# EAGLE board controll_8motor_dac_already_compl (EAGLE 9.3.2)
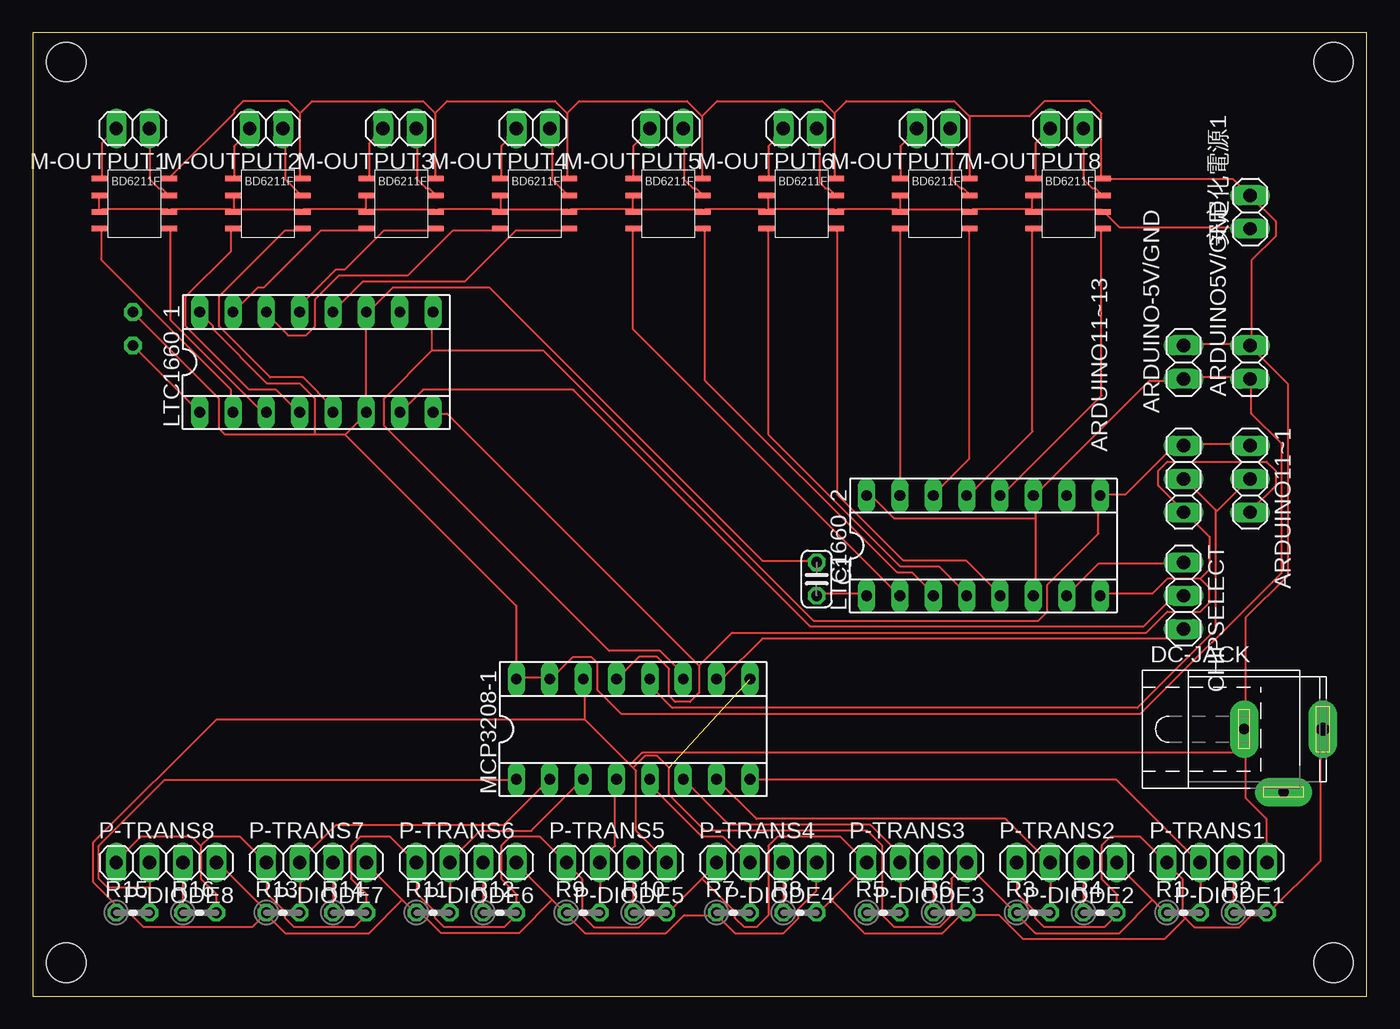
[diagram p0: board, top side]
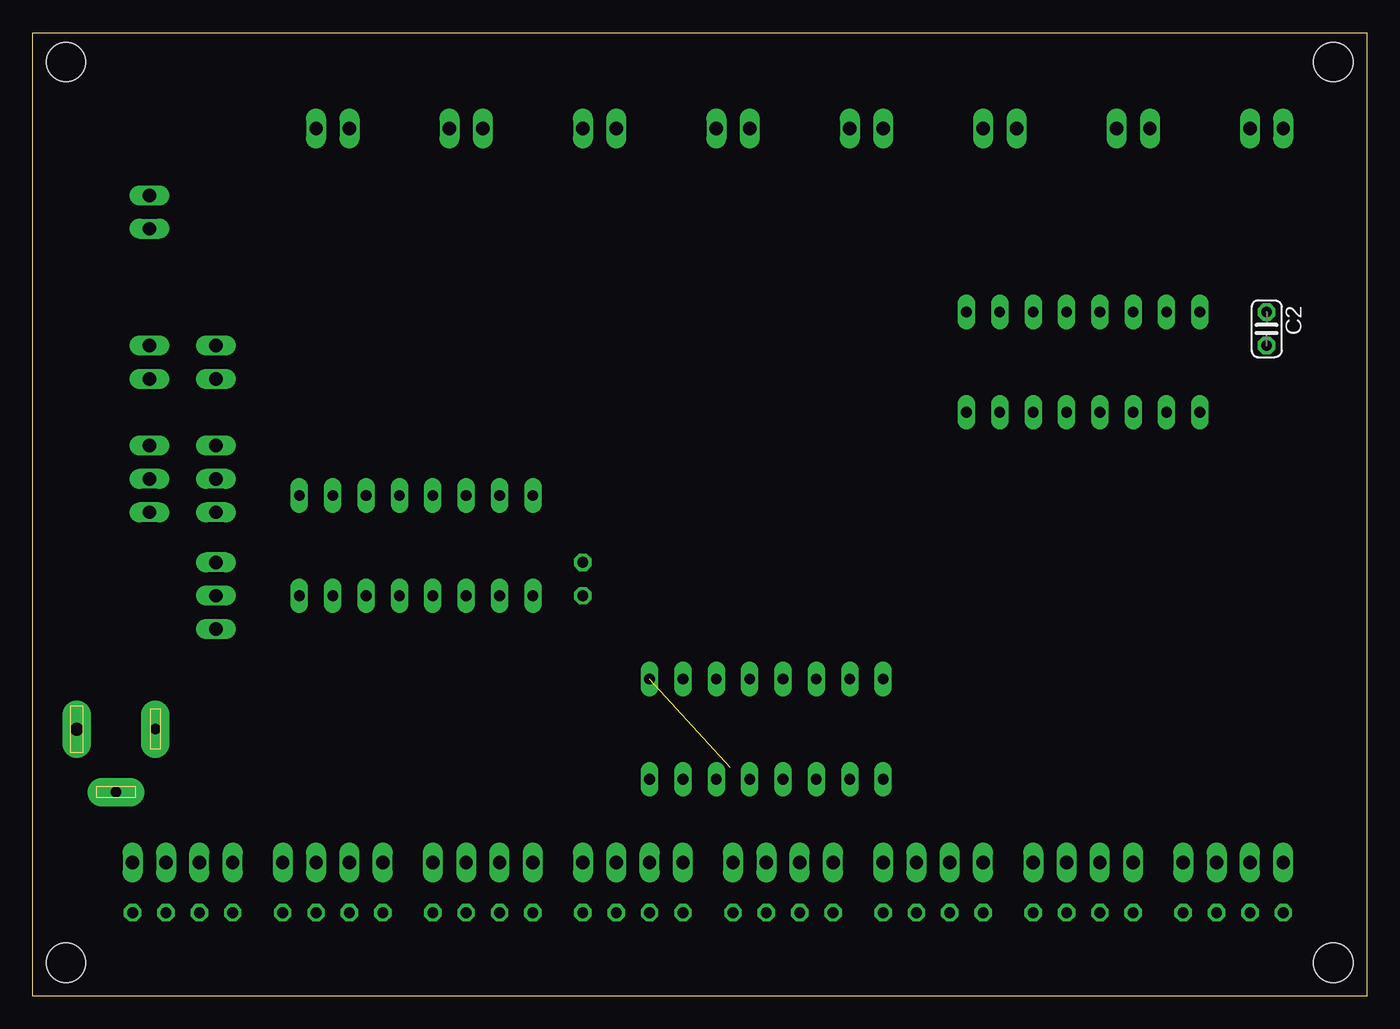
[diagram p1: board, bottom side, seen from below]

Size 101.58 x 73.33 mm. Coordinates in mm from the lower left corner, seen from the top.
Outline: 0,0 101.58,0 101.58,73.33 0,73.33 0,0
Copper layers (1*16): Top 0.035mm / dielectric 1.5mm / Bottom 0.035mm
Design rules "default_12mil": minimum track width 6mil, minimum drill 0.35mm, track to track 12mil, track to pad 12mil, pad to pad 12mil, via to via 12mil, smd to smd 12mil, copper to edge 40mil, drill to drill 6mil, minimum pad ring 10mil, minimum via ring 8mil, stop-mask expansion 4mil, vias tented up to drill 0mil, thermal gap 12mil
Net classes: 0 default: clearance 0.205 mm
Holes 3 mm at 2.54,71.12 99.06,71.12 99.06,2.54 2.54,2.54

## Footprints (pad centres in the part's own frame; a part is rotated, then mirrored left to right if it is on the bottom)
1X02 = drill 1.016 long: 1 -1.27,0; 2 1.27,0
1X03 = drill 1.016 long: 1 -2.54,0; 2 0,0; 3 2.54,0
C025-024X044 = drill 0.813 octagon: 1 -1.27,0; 2 1.27,0
SPC4077 = drill 0.8 pad 2.184 long: 1 -3,0; 2 0,-4.8 | drill 1 pad 2.184 long: 3 3,0
SOCKET-16 = drill 0.813 long: 1 -8.89,-3.81; 2 -6.35,-3.81; 3 -3.81,-3.81; 4 -1.27,-3.81; 5 1.27,-3.81; 6 3.81,-3.81; 7 6.35,-3.81; 8 8.89,-3.81; 9 8.89,3.81; 10 6.35,3.81; 11 3.81,3.81; 12 1.27,3.81; 13 -1.27,3.81; 14 -3.81,3.81; 15 -6.35,3.81; 16 -8.89,3.81
BD6211F-E2 = smd 1.2 x 0.42: 1 -2.54,2.54; 2 -2.54,1.27; 3 -2.54,0; 4 -2.54,-1.27; 5 2.76,-1.27; 6 2.76,0; 7 2.76,1.27; 8 2.76,2.54
0204V = drill 0.813 octagon: 1 -1.27,0; 2 1.27,0

## Placement (x,y rotation side)
ARDUINO5V/GND  [1X02]  92.71,48.26 90 top
ARDUINO11~1  [1X03]  92.71,39.37 270 top
ARDUINO11~13  [1X03]  87.63,39.37 270 top
ARDUINO-5V/GND  [1X02]  87.63,48.26 90 top
C1  0.1uF  [C025-024X044]  59.69,31.75 270 top
C2  0.1uF  [C025-024X044]  7.62,50.8 270 bottom
CHIPSELECT  [1X03]  87.63,30.48 270 top
DC-JACK  [SPC4077]  95.25,20.32 0 top
LTC1660_1  [SOCKET-16]  21.59,48.26 0 top
LTC1660_2  [SOCKET-16]  72.39,34.29 0 top
M-DRIVER_1  BD6211F-E2  [BD6211F-E2]  7.62,59.69 0 top
M-DRIVER_2  BD6211F-E2  [BD6211F-E2]  17.78,59.69 0 top
M-DRIVER_3  BD6211F-E2  [BD6211F-E2]  27.94,59.69 0 top
M-DRIVER_4  BD6211F-E2  [BD6211F-E2]  38.1,59.69 0 top
M-DRIVER_5  BD6211F-E2  [BD6211F-E2]  48.26,59.69 0 top
M-DRIVER_6  BD6211F-E2  [BD6211F-E2]  58.42,59.69 0 top
M-DRIVER_7  BD6211F-E2  [BD6211F-E2]  68.58,59.69 0 top
M-DRIVER_8  BD6211F-E2  [BD6211F-E2]  78.74,59.69 0 top
M-OUTPUT1  [1X02]  7.62,66.04 180 top
M-OUTPUT2  [1X02]  17.78,66.04 180 top
M-OUTPUT3  [1X02]  27.94,66.04 180 top
M-OUTPUT4  [1X02]  38.1,66.04 180 top
M-OUTPUT5  [1X02]  48.26,66.04 180 top
M-OUTPUT6  [1X02]  58.42,66.04 180 top
M-OUTPUT7  [1X02]  68.58,66.04 180 top
M-OUTPUT8  [1X02]  78.74,66.04 180 top
MCP3208‐1  [SOCKET-16]  45.72,20.32 0 top
P-DIODE1  [1X02]  92.71,10.16 180 top
P-DIODE2  [1X02]  81.28,10.16 180 top
P-DIODE3  [1X02]  69.85,10.16 180 top
P-DIODE4  [1X02]  58.42,10.16 180 top
P-DIODE5  [1X02]  46.99,10.16 180 top
P-DIODE6  [1X02]  35.56,10.16 180 top
P-DIODE7  [1X02]  24.13,10.16 180 top
P-DIODE8  [1X02]  12.7,10.16 180 top
P-TRANS1  [1X02]  87.63,10.16 0 top
P-TRANS2  [1X02]  76.2,10.16 0 top
P-TRANS3  [1X02]  64.77,10.16 0 top
P-TRANS4  [1X02]  53.34,10.16 0 top
P-TRANS5  [1X02]  41.91,10.16 0 top
P-TRANS6  [1X02]  30.48,10.16 0 top
P-TRANS7  [1X02]  19.05,10.16 0 top
P-TRANS8  [1X02]  7.62,10.16 0 top
R1  2.2K  [0204V]  87.63,6.35 0 top
R2  240  [0204V]  92.71,6.35 0 top
R3  2.2K  [0204V]  76.2,6.35 0 top
R4  240  [0204V]  81.28,6.35 0 top
R5  2.2K  [0204V]  64.77,6.35 0 top
R6  240  [0204V]  69.85,6.35 0 top
R7  2.2K  [0204V]  53.34,6.35 0 top
R8  240  [0204V]  58.42,6.35 0 top
R9  2.2K  [0204V]  41.91,6.35 0 top
R10  240  [0204V]  46.99,6.35 0 top
R11  2.2K  [0204V]  30.48,6.35 0 top
R12  240  [0204V]  35.56,6.35 0 top
R13  2.2K  [0204V]  19.05,6.35 0 top
R14  240  [0204V]  24.13,6.35 0 top
R15  2.2K  [0204V]  7.62,6.35 0 top
R16  240  [0204V]  12.7,6.35 0 top
安定化電源1  [1X02]  92.71,59.69 90 top

## Library data of the parts
ARDUINO5V/GND ARDUINO11~1 ARDUINO11~13 ARDUINO-5V/GND CHIPSELECT M-OUTPUT1-M-OUTPUT8 P-DIODE1-P-DIODE8 P-TRANS1-P-TRANS8 安定化電源1 = pinhead
C1 C2 = rcl; SPICEPREFIX: C
DC-JACK = con-jack; OC_FARNELL: unknown; OC_NEWARK: unknown
LTC1660_1 LTC1660_2 MCP3208‐1 = ic-package
M-DRIVER_1-M-DRIVER_8 = BD6211F
R1-R16 = rcl; SPICEPREFIX: R

## Nets
ARDUINO-5V/GND: ARDUINO5V/GND.1 ARDUINO-5V/GND.1 C1.1 C2.1 LTC1660_1.6 LTC1660_1.11 LTC1660_1.16 LTC1660_2.6 LTC1660_2.11 LTC1660_2.16 MCP3208‐1.15 MCP3208‐1.16
N$1: LTC1660_1.12 M-DRIVER_4.5
N$2: M-DRIVER_4.1 M-OUTPUT4.2
N$3: LTC1660_1.14 M-DRIVER_4.4
N$4: LTC1660_1.15 M-DRIVER_3.4
N$5: LTC1660_2.12 M-DRIVER_8.5
N$6: LTC1660_2.13 M-DRIVER_8.4
N$7: LTC1660_2.14 M-DRIVER_7.5
N$8: LTC1660_2.15 M-DRIVER_7.4
N$9: LTC1660_1.5 M-DRIVER_2.5
N$10: LTC1660_1.4 M-DRIVER_2.4
N$11: LTC1660_1.3 M-DRIVER_1.5
N$12: LTC1660_1.2 M-DRIVER_1.4
N$13: M-DRIVER_5.1 M-OUTPUT5.2
N$14: LTC1660_2.4 M-DRIVER_6.4
N$15: LTC1660_2.3 M-DRIVER_5.5
N$16: LTC1660_2.2 M-DRIVER_5.4
N$17: M-DRIVER_4.7 M-OUTPUT4.1
N$18: M-DRIVER_3.7 M-OUTPUT3.1
N$19: M-DRIVER_3.1 M-OUTPUT3.2
N$20: M-DRIVER_8.7 M-OUTPUT8.1
N$21: M-DRIVER_8.1 M-OUTPUT8.2
N$22: M-DRIVER_7.7 M-OUTPUT7.1
N$23: M-DRIVER_7.1 M-OUTPUT7.2
N$24: M-DRIVER_1.7 M-OUTPUT1.1
N$25: ARDUINO11~1.1 ARDUINO11~13.1 LTC1660_1.9 LTC1660_2.9 MCP3208‐1.11
N$26: LTC1660_1.13 M-DRIVER_3.5
N$27: M-DRIVER_2.7 M-OUTPUT2.1
N$28: M-DRIVER_2.1 M-OUTPUT2.2
N$29: LTC1660_2.5 M-DRIVER_6.5
N$30: M-DRIVER_5.7 M-OUTPUT5.1
N$31: M-DRIVER_6.1 M-OUTPUT6.2
N$32: M-DRIVER_6.7 M-OUTPUT6.1
N$33: M-DRIVER_1.2 M-DRIVER_1.3 M-DRIVER_1.6 M-DRIVER_2.2 M-DRIVER_2.3 M-DRIVER_2.6 M-DRIVER_3.2 M-DRIVER_3.3 M-DRIVER_3.6 M-DRIVER_4.2 M-DRIVER_4.3 M-DRIVER_4.6 M-DRIVER_5.2 M-DRIVER_5.3 M-DRIVER_5.6 M-DRIVER_6.2 M-DRIVER_6.3 M-DRIVER_6.6 M-DRIVER_7.2 M-DRIVER_7.3 M-DRIVER_7.6 M-DRIVER_8.2 M-DRIVER_8.3 M-DRIVER_8.6 安定化電源1.1
N$34: C2.2 LTC1660_1.1
N$35: C1.2 LTC1660_2.1
N$38: ARDUINO11~1.3 ARDUINO11~13.3 LTC1660_1.8 LTC1660_2.8 MCP3208‐1.13
N$39: CHIPSELECT.2 LTC1660_1.7
N$40: M-DRIVER_1.1 M-OUTPUT1.2
N$41: CHIPSELECT.1 LTC1660_2.7
N$42: ARDUINO11~1.2 ARDUINO11~13.2 MCP3208‐1.12
N$43: P-DIODE8.2 R16.1
N$44: CHIPSELECT.3 MCP3208‐1.10
N$45: P-DIODE7.2 R14.1
N$46: P-DIODE6.2 R12.1
N$47: P-DIODE5.2 R10.1
N$48: P-DIODE4.2 R8.1
N$49: P-DIODE3.2 R6.1
N$50: P-DIODE2.2 R4.1
N$51: P-DIODE1.2 R2.1
N$52: MCP3208‐1.7 P-TRANS2.2 R3.2
N$53: MCP3208‐1.8 P-TRANS1.2 R1.2
N$54: MCP3208‐1.6 P-TRANS3.2 R5.2
N$55: MCP3208‐1.5 P-TRANS4.2 R7.2
N$56: MCP3208‐1.4 P-TRANS5.2 R9.2
N$57: MCP3208‐1.3 P-TRANS6.2 R11.2
N$58: MCP3208‐1.2 P-TRANS7.2 R13.2
N$59: MCP3208‐1.1 P-TRANS8.2 R15.2
N$97: DC-JACK.3 P-TRANS1.1 P-TRANS2.1 P-TRANS3.1 P-TRANS4.1 P-TRANS5.1 P-TRANS6.1 P-TRANS7.1 P-TRANS8.1 R2.2 R4.2 R6.2 R8.2 R10.2 R12.2 R14.2 R16.2
P-DIORD1: ARDUINO5V/GND.2 ARDUINO-5V/GND.2 DC-JACK.1 M-DRIVER_1.8 M-DRIVER_2.8 M-DRIVER_3.8 M-DRIVER_4.8 M-DRIVER_5.8 M-DRIVER_6.8 M-DRIVER_7.8 M-DRIVER_8.8 MCP3208‐1.9 MCP3208‐1.14 P-DIODE1.1 P-DIODE2.1 P-DIODE3.1 P-DIODE4.1 P-DIODE5.1 P-DIODE6.1 P-DIODE7.1 P-DIODE8.1 R1.1 R3.1 R5.1 R7.1 R9.1 R11.1 R13.1 R15.1 安定化電源1.2

## Tracks (layer width: path | path; a pad name or v marks a point on that pad's centre or on a via)
ARDUINO-5V/GND
  Top 0.152: 76.35,36.35 76.35,37.95 LTC1660_2.11 76.35,38.18 85.04,46.86 87.55,46.86 ARDUINO-5V/GND.1 87.78,47.09 92.58,47.09 ARDUINO5V/GND.1 92.81,46.86 92.81,44.35 95.1,42.06 95.1,32.23 84.35,21.49 44.81,21.49 42.98,23.32 42.98,25.38 42.52,25.83 41.15,25.83 39.55,24.23 MCP3208‐1.15 39.32,24.23 37.03,24.23 MCP3208‐1.16 36.8,24.23 36.8,29.72 23.77,42.75 | 76.35,36.35 76.35,30.63 LTC1660_2.6 | 76.35,36.35 65.61,36.35 64.01,37.95 63.55,37.95 LTC1660_2.16 | 23.77,42.75 21.49,42.75 | 21.49,42.75 14.63,42.75 14.17,43.2 14.17,45.49 7.77,51.89 C2.1 | 23.77,42.75 25.38,44.35 LTC1660_1.6 25.38,44.58 25.38,51.89 LTC1660_1.11 25.6,52.12 27.43,53.95 34.75,53.95 55.55,33.15 59.66,33.15 C1.1 | 21.49,42.75 21.49,45.49 20.34,46.63 17.83,46.63 13.72,50.75 13.72,50.98 12.8,51.89 LTC1660_1.16
N$1
  Top 0.152: M-DRIVER_4.5 40.69,58.29 36.8,58.29 32.92,54.41 25.15,54.41 22.86,52.12 LTC1660_1.12
N$2
  Top 0.152: M-DRIVER_4.1 35.66,62.41 35.66,64.69 36.8,65.84 M-OUTPUT4.2
N$3
  Top 0.152: M-DRIVER_4.4 35.43,58.29 32,58.29 28.57,54.86 23.32,54.86 21.49,53.03 21.49,50.98 20.8,50.29 19.43,50.29 17.83,51.89 LTC1660_1.14
N$4
  Top 0.152: M-DRIVER_3.4 25.38,58.29 21.95,58.29 17.6,53.95 17.14,53.95 15.32,52.12 LTC1660_1.15
N$5
  Top 0.152: M-DRIVER_8.5 81.38,58.29 81.38,45.72 73.84,38.18 LTC1660_2.12
N$6
  Top 0.152: M-DRIVER_8.4 76.12,58.29 76.12,42.98 71.32,38.18 LTC1660_2.13
N$7
  Top 0.152: M-DRIVER_7.5 71.32,58.29 71.32,40.92 68.58,38.18 LTC1660_2.14
N$8
  Top 0.152: M-DRIVER_7.4 66.06,58.29 66.06,38.18 LTC1660_2.15
N$9
  Top 0.152: LTC1660_1.5 22.86,44.81 20.57,47.09 18.06,47.09 14.17,50.98 14.17,53.26 19.2,58.29 20.34,58.29 M-DRIVER_2.5
N$10
  Top 0.152: M-DRIVER_2.4 15.09,58.29 15.09,56.69 11.66,53.26 11.66,50.98 16.46,46.18 18.52,46.18 20.12,44.58 LTC1660_1.4
N$11
  Top 0.152: M-DRIVER_1.5 10.52,58.29 10.52,51.44 17.6,44.35 LTC1660_1.3
N$12
  Top 0.152: M-DRIVER_1.4 5.26,58.29 5.26,56.01 15.09,46.18 15.09,44.58 LTC1660_1.2
N$13
  Top 0.152: M-DRIVER_5.1 45.72,64.69 46.86,65.84 M-OUTPUT5.2
N$14
  Top 0.152: M-DRIVER_6.4 56.01,58.29 56.01,42.75 66.06,32.69 69.04,32.69 71.09,30.63 LTC1660_2.4
N$15
  Top 0.152: M-DRIVER_5.5 51.21,58.29 51.21,46.86 65.84,32.23 66.98,32.23 68.58,30.63 LTC1660_2.3
N$16
  Top 0.152: M-DRIVER_5.4 45.72,50.75 65.84,30.63 LTC1660_2.2
N$17
  Top 0.152: M-DRIVER_4.7 40.69,61.04 39.55,62.18 39.55,65.84 M-OUTPUT4.1
N$18
  Top 0.152: M-DRIVER_3.7 30.63,61.04 30.18,61.49 29.95,61.49 29.26,62.18 29.26,65.84 M-OUTPUT3.1
N$19
  Top 0.152: M-DRIVER_3.1 25.6,62.41 25.6,64.92 26.52,65.84 M-OUTPUT3.2
N$20
  Top 0.152: M-OUTPUT8.1 80.01,62.18 80.7,61.49 80.92,61.49 81.38,61.04 M-DRIVER_8.7
N$21
  Top 0.152: M-OUTPUT8.2 76.35,64.92 76.35,62.41 M-DRIVER_8.1
N$22
  Top 0.152: M-DRIVER_7.7 71.32,61.04 70.87,61.49 70.64,61.49 69.95,62.18 69.95,65.84 M-OUTPUT7.1
N$23
  Top 0.152: M-DRIVER_7.1 66.06,62.41 66.06,64.69 67.21,65.84 M-OUTPUT7.2
N$24
  Top 0.152: M-DRIVER_1.7 10.29,61.04 9.83,61.49 9.6,61.49 8.91,62.18 8.91,65.84 M-OUTPUT1.1
N$25
  Top 0.152: ARDUINO11~1.1 92.58,42.06 87.78,42.06 ARDUINO11~13.1 87.55,41.83 86.87,41.83 83.21,38.18 81.38,38.18 LTC1660_2.9 81.15,37.95 81.15,35.2 77.27,31.32 77.27,29.26 76.58,28.57 59.44,28.57 38.86,49.15 30.4,49.15 | 30.4,49.15 30.4,51.89 LTC1660_1.9 | 30.4,49.15 26.75,45.49 26.75,43.43 43.89,26.29 47.78,26.29 49.38,24.69 49.38,24.23 MCP3208‐1.11
N$26
  Top 0.152: M-DRIVER_3.5 30.63,58.29 26.75,58.29 23.77,55.32 23.09,55.32 20.34,52.58 20.34,52.12 LTC1660_1.13
N$27
  Top 0.152: M-DRIVER_2.7 20.34,61.04 19.2,62.18 19.2,65.84 M-OUTPUT2.1
N$28
  Top 0.152: M-DRIVER_2.1 15.32,62.41 15.32,64.69 16.46,65.84 M-OUTPUT2.2
N$29
  Top 0.152: M-DRIVER_6.5 61.27,58.29 61.27,38.18 66.29,33.15 71.09,33.15 73.61,30.63 LTC1660_2.5
N$30
  Top 0.152: M-DRIVER_5.7 50.98,61.04 50.52,61.49 50.29,61.49 49.61,62.18 49.61,65.84 M-OUTPUT5.1
N$31
  Top 0.152: M-DRIVER_6.1 56.01,62.41 56.01,64.69 57.15,65.84 M-OUTPUT6.2
N$32
  Top 0.152: M-DRIVER_6.7 61.04,61.04 60.58,61.49 60.35,61.49 59.89,61.95 59.89,65.84 M-OUTPUT6.1
N$33
  Top 0.152: 76.12,59.89 71.55,59.89 M-DRIVER_7.6 71.32,59.89 66.06,59.89 | 76.12,59.89 76.12,60.81 M-DRIVER_8.2 | 76.12,59.89 M-DRIVER_8.3 76.35,59.89 81.38,59.89 M-DRIVER_8.6 81.61,59.66 82.75,58.52 92.58,58.52 安定化電源1.1 | 56.01,59.89 56.01,60.81 M-DRIVER_6.2 | 66.06,59.89 66.06,60.81 M-DRIVER_7.2 | 56.01,59.89 61.04,59.89 M-DRIVER_6.6 61.27,59.89 65.84,59.89 M-DRIVER_7.3 66.06,59.89 | 56.01,59.89 M-DRIVER_6.3 55.78,59.89 51.21,59.89 M-DRIVER_5.6 50.98,59.89 45.72,59.89 | 45.72,59.89 40.92,59.89 M-DRIVER_4.6 40.69,59.89 35.66,59.89 | 45.72,59.89 M-DRIVER_5.2 | 35.66,59.89 35.66,60.81 M-DRIVER_4.2 | 25.38,59.89 20.57,59.89 M-DRIVER_2.6 20.34,59.89 15.32,59.89 | 25.38,59.89 25.38,60.81 M-DRIVER_3.2 | 25.38,59.89 M-DRIVER_3.3 25.6,59.89 30.63,59.89 M-DRIVER_3.6 30.86,59.89 35.43,59.89 M-DRIVER_4.3 35.66,59.89 | M-DRIVER_1.2 5.03,60.81 5.03,59.89 M-DRIVER_1.3 5.26,59.89 10.29,59.89 M-DRIVER_1.6 10.52,59.89 15.09,59.89 M-DRIVER_2.3 15.32,59.89 | 15.32,59.89 15.32,60.81 M-DRIVER_2.2 | 45.72,59.89 M-DRIVER_5.3
N$34
  Top 0.152: C2.2 LTC1660_1.1
N$35
  Top 0.152: C1.2 59.89,30.63 63.32,30.63 LTC1660_2.1
N$38
  Top 0.152: 88.92,31.77 86.41,31.77 85.27,30.63 81.38,30.63 LTC1660_2.8 | 88.92,31.77 89.61,32.46 89.61,34.98 87.78,36.8 ARDUINO11~13.3 87.55,37.03 85.72,38.86 85.72,40.01 86.41,40.69 93.95,40.69 94.64,40.01 94.64,38.86 92.81,37.03 ARDUINO11~1.3 | 50.75,25.15 50.75,23.09 50.06,22.4 48.92,22.4 48.46,22.86 48.46,24.92 47.55,25.83 46.18,25.83 44.58,24.23 MCP3208‐1.13 | 50.75,25.15 31.55,44.35 30.63,44.35 LTC1660_1.8 | 88.92,31.77 89.61,31.09 89.61,29.95 88.92,29.26 86.41,29.26 84.81,27.66 53.26,27.66 50.75,25.15
N$39
  Top 0.152: LTC1660_1.7 28.12,44.58 29.72,46.18 41.15,46.18 59.21,28.12 84.58,28.12 86.87,30.4 87.55,30.4 CHIPSELECT.2
N$40
  Top 0.152: M-DRIVER_1.1 5.26,62.41 5.26,64.92 6.17,65.84 M-OUTPUT1.2
N$41
  Top 0.152: LTC1660_2.7 78.87,30.63 81.15,32.92 87.55,32.92 CHIPSELECT.1
N$42
  Top 0.152: 90.07,36.8 90.07,37.03 87.78,39.32 ARDUINO11~13.2 | 90.07,36.8 90.07,27.89 84.12,21.95 48.69,21.95 47.09,23.55 47.09,24 MCP3208‐1.12 | 90.07,36.8 92.58,39.32 ARDUINO11~1.2
N$43
  Top 0.152: P-DIODE8.2 R16.1
N$44
  Top 0.152: MCP3208‐1.10 52.12,24.23 52.58,24.23 55.55,27.2 86.87,27.2 87.55,27.89 CHIPSELECT.3
N$45
  Top 0.152: P-DIODE7.2 R14.1
N$46
  Top 0.152: P-DIODE6.2 R12.1
N$47
  Top 0.152: P-DIODE5.2 R10.1
N$48
  Top 0.152: P-DIODE4.2 R8.1
N$49
  Top 0.152: P-DIODE3.2 R6.1
N$50
  Top 0.152: P-DIODE2.2 R4.1
N$51
  Top 0.152: P-DIODE1.2 R2.1
N$52
  Top 0.152: R3.2 77.5,6.4 77.5,10.06 P-TRANS2.2 77.27,10.29 74.07,13.49 55.09,13.49 MCP3208‐1.7
N$53
  Top 0.152: MCP3208‐1.8 54.63,16.46 82.53,16.46 88.7,10.29 P-TRANS1.2 88.92,10.06 88.92,6.4 R1.2
N$54
  Top 0.152: R5.2 66.06,6.4 66.06,10.06 P-TRANS3.2 65.84,10.29 65.84,10.97 63.78,13.03 53.03,13.03 49.61,16.46 MCP3208‐1.6
N$55
  Top 0.152: MCP3208‐1.5 47.09,16.46 47.09,16 50.98,12.12 52.58,12.12 54.41,10.29 P-TRANS4.2 54.63,10.06 54.63,6.4 R7.2
N$56
  Top 0.152: R9.2 43.2,6.4 43.2,10.06 P-TRANS5.2 43.2,10.29 44.35,11.43 44.35,16.46 MCP3208‐1.4
N$57
  Top 0.152: R11.2 31.77,6.4 31.77,10.06 P-TRANS6.2 31.77,10.29 34.06,12.57 37.95,12.57 41.83,16.46 MCP3208‐1.3
N$58
  Top 0.152: R13.2 20.34,6.4 20.34,10.06 P-TRANS7.2 20.34,10.29 23.09,13.03 35.89,13.03 MCP3208‐1.2
N$59
  Top 0.152: 8.91,8.23 8.91,10.06 P-TRANS8.2 | 8.91,8.23 8.91,6.4 R15.2 | 8.91,8.23 5.71,8.23 5.03,8.91 5.03,11.43 10.06,16.46 36.8,16.46 MCP3208‐1.1
N$97
  Top 0.152: 12.8,11.43 12.8,8.91 13.95,7.77 13.95,6.4 R16.2 | 12.8,11.43 13.49,12.12 15.77,12.12 17.6,10.29 P-TRANS7.1 17.83,10.06 17.83,7.77 19.2,6.4 19.2,5.94 19.89,5.26 24.46,5.26 25.38,6.17 R14.2 25.38,6.4 25.38,7.77 24.23,8.91 24.23,11.43 24.92,12.12 27.2,12.12 29.03,10.29 P-TRANS6.1 29.26,10.06 29.26,7.77 30.63,6.4 30.63,5.94 31.32,5.26 35.89,5.26 36.8,6.17 R12.2 36.8,6.4 36.8,7.77 35.66,8.91 35.66,11.43 36.35,12.12 38.63,12.12 40.46,10.29 P-TRANS5.1 40.69,10.06 41.83,8.91 41.83,6.17 42.75,5.26 46.18,5.26 47.09,6.17 48.23,6.17 R10.2 48.46,6.4 50.98,8.91 | 12.8,11.43 12.12,12.12 8.23,12.12 6.4,10.29 P-TRANS8.1 | 50.98,8.91 52.12,10.06 P-TRANS4.1 | 60.81,7.32 63.55,10.06 P-TRANS3.1 63.32,10.29 61.49,12.12 56.69,12.12 56.01,11.43 56.01,6.17 55.09,5.26 54.18,5.26 53.49,5.94 53.49,6.4 50.98,8.91 | 60.81,7.32 59.89,6.4 R8.2 | 60.81,7.32 63.32,4.8 69.27,4.8 70.64,6.17 71.09,6.17 R6.2 71.32,6.17 73.61,6.17 75.44,4.34 86.18,4.34 87.78,5.94 | 87.78,5.94 87.55,6.17 87.55,8.91 86.41,10.06 P-TRANS1.1 86.18,10.29 84.35,12.12 82.07,12.12 81.38,11.43 81.38,8.91 82.53,7.77 82.53,6.4 R4.2 82.53,6.17 81.61,5.26 77.04,5.26 76.35,5.94 76.35,6.4 74.98,7.77 74.98,10.06 P-TRANS2.1 | 87.78,5.94 88.47,5.26 91.9,5.26 92.81,6.17 93.95,6.17 R2.2 94.18,6.4 98.07,10.29 98.07,20.12 DC-JACK.3
P-DIORD1  (1 unrouted)
  Top 0.152: 28.12,7.32 25.38,10.06 P-DIODE7.1 | 28.12,7.32 29.03,6.4 R11.1 29.26,6.17 29.72,6.17 31.09,4.8 37.03,4.8 39.55,7.32 | R13.1 16.69,5.26 8.46,5.26 7.54,6.17 6.4,6.17 R15.1 6.17,6.4 6.17,7.09 4.57,8.69 4.57,11.66 13.95,21.03 42.06,21.03 | P-DIODE8.1 14.17,10.06 17.83,6.4 R13.1 | 28.12,7.32 25.6,4.8 19.2,4.8 17.83,6.17 R13.1 | 39.55,7.32 36.8,10.06 P-DIODE6.1 | 39.55,7.32 40.46,6.4 R9.1 40.69,6.17 42.06,4.8 48.23,4.8 49.61,6.17 51.89,6.17 R7.1 52.12,6.17 53.49,4.8 57.15,4.8 58.29,5.94 58.29,6.63 59.66,8 59.66,10.06 P-DIODE4.1 | 42.06,21.03 42.06,24 MCP3208‐1.14 | 45.72,17.37 45.95,17.14 45.95,12.57 48.23,10.29 P-DIODE5.1 | 45.72,17.37 45.49,17.6 | 45.49,17.6 42.06,21.03 | 85.27,7.32 82.53,10.06 P-DIODE2.1 | 85.27,7.32 86.18,6.4 R1.1 | 64.69,6.17 63.55,6.17 R5.1 | 64.69,6.17 65.61,5.26 69.04,5.26 69.95,6.17 69.95,8.91 71.09,10.06 | 71.09,10.06 74.75,6.4 R3.1 74.98,6.17 76.35,4.8 82.75,4.8 85.27,7.32 | 71.09,10.06 P-DIODE3.1 | 45.72,17.37 46.63,18.29 47.55,18.29 48.46,17.37 48.46,15.32 51.21,12.57 63.55,12.57 64.69,11.43 64.69,6.17 | 20.34,67.21 19.43,68.12 16,68.12 15.32,67.44 15.32,67.21 10.52,62.41 M-DRIVER_1.8 | 20.34,67.21 20.34,62.41 M-DRIVER_2.8 | 30.63,67.21 30.63,62.41 M-DRIVER_3.8 | 30.63,67.21 29.72,68.12 21.26,68.12 20.34,67.21 | 40.69,67.21 40.69,62.41 M-DRIVER_4.8 | 40.69,67.21 39.78,68.12 31.55,68.12 30.63,67.21 | 50.98,66.98 50.98,62.41 M-DRIVER_5.8 | 50.98,66.98 49.84,68.12 41.6,68.12 40.69,67.21 | 61.04,67.21 61.04,62.41 M-DRIVER_6.8 | 61.04,67.21 60.12,68.12 52.12,68.12 50.98,66.98 | 71.32,66.98 71.32,62.41 M-DRIVER_7.8 | 71.32,66.98 70.18,68.12 61.95,68.12 61.04,67.21
  Top 0.152: 92.35,18.52 92.35,20.12 DC-JACK.1 | 92.35,18.52 92.35,15.09 93.95,13.49 93.95,10.29 P-DIODE1.1 | ARDUINO-5V/GND.2 87.78,49.61 92.58,49.61 ARDUINO5V/GND.2 | ARDUINO5V/GND.2 92.81,49.61 92.81,56.01 94.64,57.84 94.64,58.98 92.81,60.81 安定化電源1.2 92.58,61.04 91.44,62.18 81.61,62.18 M-DRIVER_8.8 81.38,62.41 81.38,67.21 80.47,68.12 77.04,68.12 75.89,66.98 71.32,66.98 | DC-JACK.1 92.35,20.34 92.35,28.8 95.56,32 95.56,46.63 92.81,49.38 ARDUINO5V/GND.2 | 45.49,17.6 46.41,18.52 92.35,18.52 | 92.35,18.52 DC-JACK.1